# Altium PCB LED6432Clock.PcbDoc (part 1 of 6)
Units mm, origin at the board's own origin, x right, y up, seen from the top; angles counter-clockwise.
Board outline 152.4 x 101.6 mm, 2 copper layers (Top Layer, Bottom Layer); 48 components, 0 nets, 638 pads, 127 vias.
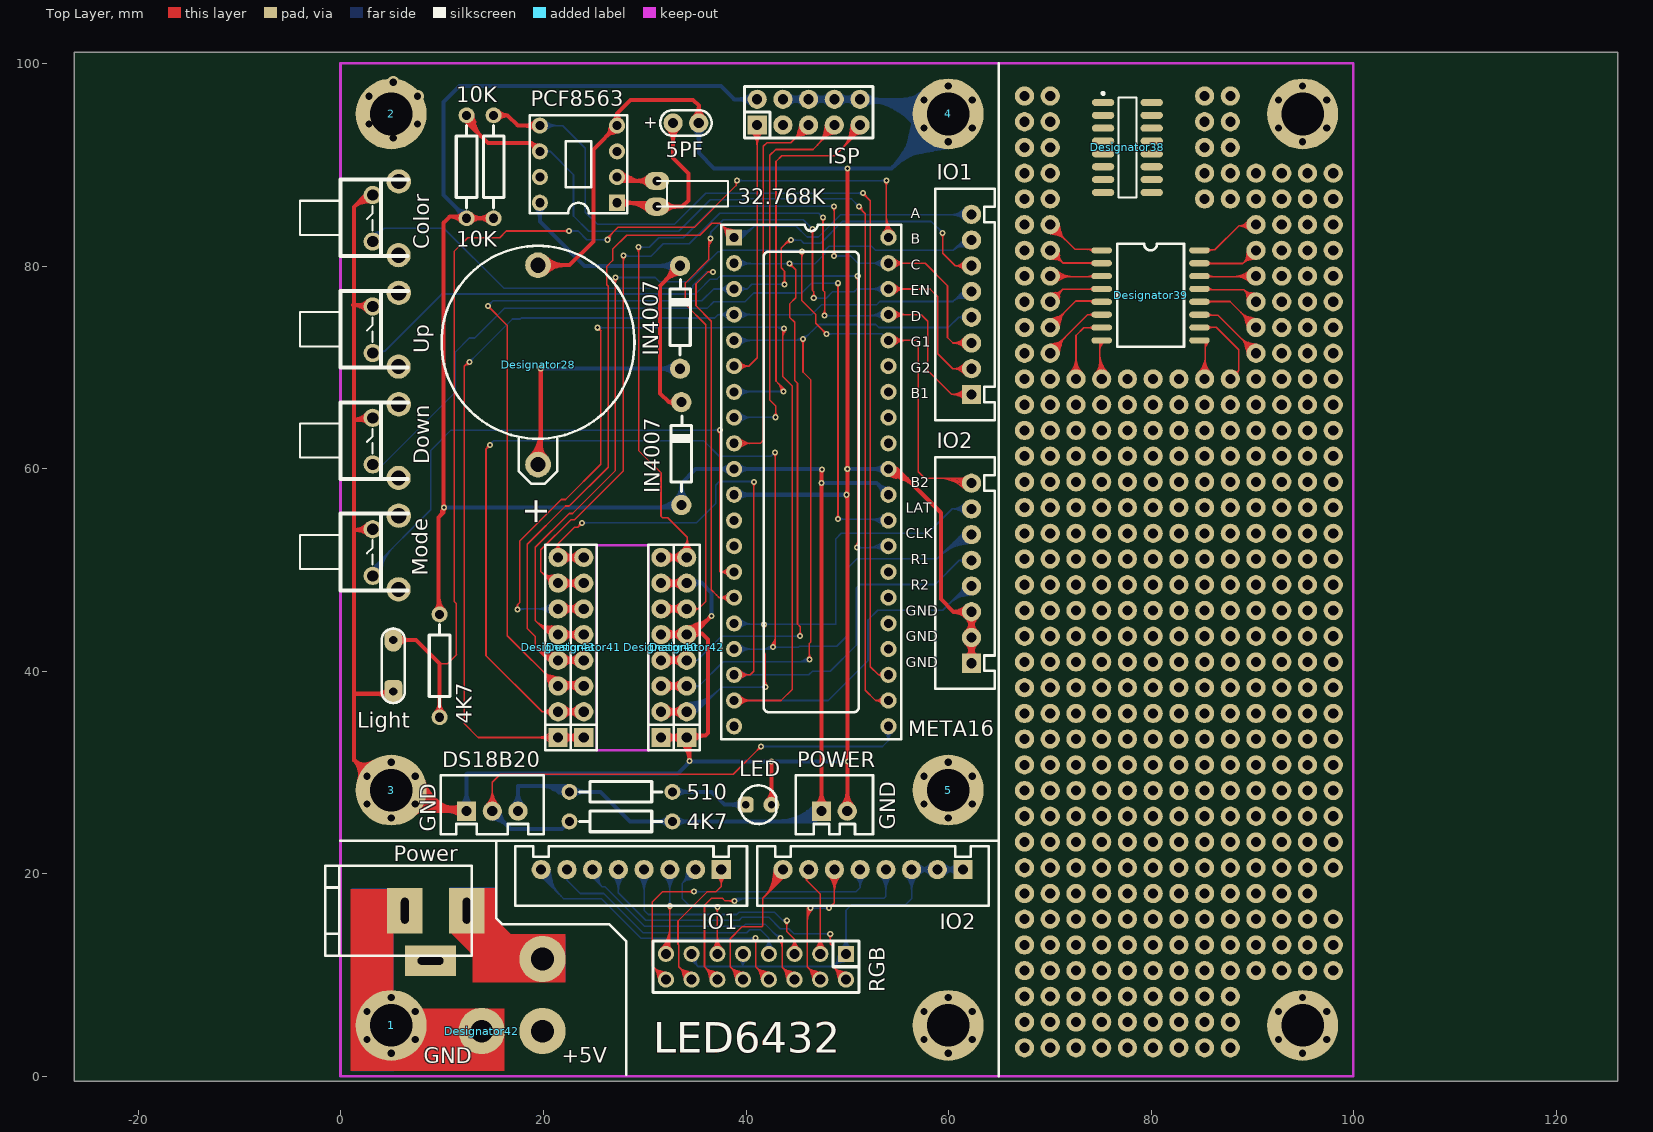
[diagram p0: Top Layer view]
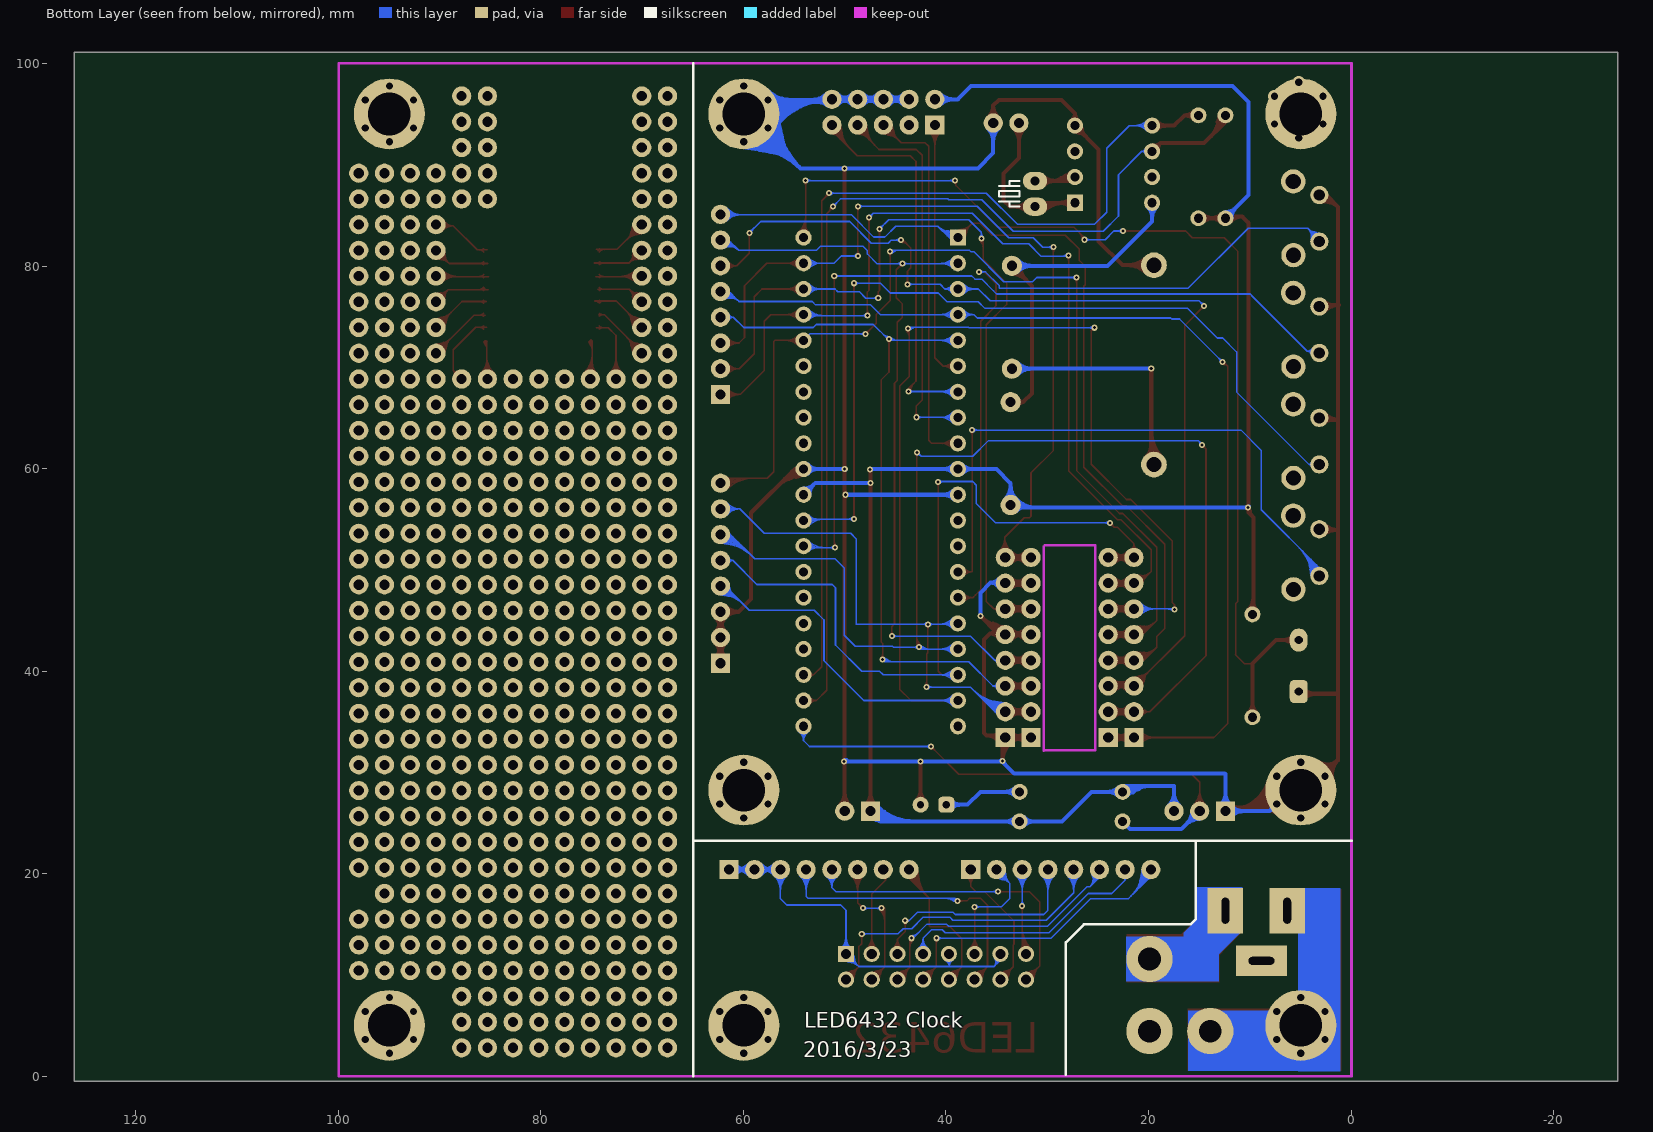
[diagram p1: Bottom Layer view, seen from below]

## Layer stack, top to bottom
Top Solder: solder mask 0.0102, Solder Resist, Dk 3.5
Top Layer: signal copper 0.0356
Dielectric 1: dielectric 0.32, FR-4, Dk 4.8
Bottom Layer: signal copper 0.0356
Bottom Solder: solder mask 0.0102, Solder Resist, Dk 3.5

## Board outline
-26.334,-0.483 126.066,-0.483 126.066,101.117 -26.334,101.117

## Design rules (kind name [scope] priority, off if disabled: settings)
Clearance [All] p1: gap=0.254
PolygonConnect [All] p1: connectstyle=Relief reliefconductorwidth=0.254 reliefentries=4 polygonreliefangle="90 Angle" airgapwidth=0.254
RoutingVias [All] p1: holewidth=0.3 width=0.6 viastyle="Through Hole" minholewidth=0.3 minwidth=0.6 maxholewidth=0.3 maxwidth=0.6
SolderMaskExpansion [All] p1: expansion=0.102
Width [All] p1: maxlimit=0.508 minlimit=0.152 preferedwidth=0.152 minimp=50.000000 maximp=50.000000 favimp=50.000000
29 further rules are at their usual default settings.

## Components (designator, comment, footprint, x,y, rotation, side; value= is the part's Value field where it differs from the comment)
1 "Comment" 螺丝孔-4mm#1 4.955,5.025 r90 top
2 "Comment" 螺丝孔-4mm#2 5.162,95.402 r90 top
3 "Comment" 螺丝孔-4mm#1 4.955,28.266 r90 top
4 "Comment" 螺丝孔-4mm#1 59.955,95.025 r90 top
4K7 "Comment" R1/4 32.721,25.171 r180 top
4K7 "Comment" R1/4 9.734,35.458 r90 top
5 "Comment" 螺丝孔-4mm#1 59.955,28.266 r90 top
5PF "Comment" DAN.1/.2 32.789,94.14 r180 top
10K "Comment" R1/4 12.401,84.734 r90 top
10K "Comment" R1/4 15.068,84.734 r90 top
32.768K "Comment" 晶振2.5/2/6/2.5 31.197,85.877 r0 top
510 "Comment" R1/4 32.721,28.092 r180 top
Color "Comment" K/2/4.5 3.13,82.422 r90 top
Designator28 "Comment" BATTERY 19.455,70.256 r90 top
Designator38 "Comment" SOIC16 77.655,91.719 r0 top
Designator39 "Comment" SOL-16 75.115,81.559 r0 top
Designator40 "Comment" "SIP8 - duplicate" 31.595,33.459 r90 top
Designator41 "Comment" "SIP8 - duplicate" 23.975,33.459 r90 top
Designator42 "Comment" 1PIN#1 13.892,4.478 r90 top
Designator42 "Comment" "SIP8 - duplicate" 34.135,33.459 r90 top
Designator43 "Comment" "SIP8 - duplicate" 21.435,33.459 r90 top
Down "Comment" K/2/4.5 3.13,60.422 r90 top
DS18B20 "Comment" P3 14.941,26.187 r0 top
IN4007 "Comment" IN4007 33.61,56.413 r90 top
IN4007 "Comment" IN4007 33.483,69.875 r90 top
IO1 "Comment" P8#1 28.657,20.415 r180 top
IO1 "Comment" P8#2 62.255,76.225 r90 top
IO2 "Comment" P8#2 52.533,20.415 r180 top
IO2 "Comment" P8#2 62.255,49.682 r90 top
ISP "Comment" "IDC10 - duplicate" 41.095,93.937 r0 top
LED "Comment" LED3mm 41.23,26.822 r0 top
Light "Comment" CC0.508cm 5.162,37.998 r90 top
META16 "Comment" DIP40插座 38.817,82.829 r0 top
Mode "Comment" K/2/4.5 3.13,49.422 r90 top
PCF8563 "Comment" DIP8插座 27.26,86.258 r180 top
POWER "Comment" P2 48.723,26.187 r0 top
Power "Comment" 电源DC插座5.4mm 12.401,16.358 r270 top
RGB "Comment" "IDC16 - duplicate" 49.866,12.09 r180 top
Up "Comment" K/2/4.5 3.13,71.422 r90 top
? "Comment" 螺丝孔-4mm#1 94.955,5.025 r90 top
? "Comment" 螺丝孔-4mm#1 59.955,5.025 r90 top
? "Comment" 螺丝孔-4mm#1 103.841,-56.871 r90 top
? "Comment" 螺丝孔-4mm#1 100.666,-54.585 r90 top
? "Comment" 1PIN#2 19.894,11.582 r90 top
? "Comment" 1PIN#3 20.021,4.47 r90 top
? "Comment" MARK 50.374,10.185 r90 top
? "Comment" MARK 8.718,10.947 r90 top
? "Comment" 螺丝孔-4mm#1 94.955,95.025 r90 top

## Footprints (in the part's own frame and the unit in brackets; to place one, negate y for a bottom-side part, rotate by r counter-clockwise, add the part's x,y. Pads: shape width x height; smd on the part's side, far side on the other; paste and mask are expansions set on the pad)
1PIN#1 [mil]
  round 180 hole 88: 1(-0.3,0)
1PIN#2 [mil]
  round 180 hole 88: 1(0,0)
1PIN#3 [mil]
  round 180 hole 88: 1(0,5)
BATTERY [mm]
  round 2.54 hole 1.5: 1(-9.842,0) 2(9.842,0)
  silkscreen extent -11.75,-9.53 11.75,9.53
CC0.508cm [mil] "5.08mm"
  rrect50% 90x70 hole 32: 1(0,0)
  oval 90x70 hole 32: 2(200,0)
  silkscreen extent -45,-45 245,45
DAN.1/.2 [mm]
  round 1.9 hole 1: 1(0,0) 2(-2.54,0)
  silkscreen extent -3.81,-1.27 1.27,1.27
DIP8插座 [mm]
  rect 1.6x1.6 hole 0.9: 1(0,0)
  round 1.6 hole 0.9: 2(0,-2.54) 3(0,-5.08) 4(0,-7.62) 5(7.62,-7.62) 6(7.62,-5.08) 7(7.62,-2.54) 8(7.62,0)
  silkscreen extent -1.02,-8.64 8.64,1.02
DIP40插座 [mm]
  rect 1.6x1.6 hole 0.9: 1(0,0)
  round 1.6 hole 0.9: 2(0,-2.54) 3(0,-5.08) 4(0,-7.62) 5(0,-10.16) 6(0,-12.7) 7(0,-15.24) 8(0,-17.78) 9(0,-20.32) 10(0,-22.86) 11(0,-25.4) 12(0,-27.94) 13(0,-30.48) 14(0,-33.02) 15(0,-35.56) 16(0,-38.1) 17(0,-40.64) 18(0,-43.18) 19(0,-45.72) 20(0,-48.26) 21(15.24,-48.26) 22(15.24,-45.72) 23(15.24,-43.18) 24(15.24,-40.64) 25(15.24,-38.1) 26(15.24,-35.56) 27(15.24,-33.02) 28(15.24,-30.48) 29(15.24,-27.94) 30(15.24,-25.4) 31(15.24,-22.86) 32(15.24,-20.32) 33(15.24,-17.78) 34(15.24,-15.24) 35(15.24,-12.7) 36(15.24,-10.16) 37(15.24,-7.62) 38(15.24,-5.08) 39(15.24,-2.54) 40(15.24,0)
  silkscreen extent -1.27,-49.53 16.51,1.27
"IDC10 - duplicate" [mm]
  rect 1.9x1.9 hole 1: 1(0,0)
  round 1.9 hole 1: 2(0,2.54) 3(2.54,0) 4(2.54,2.54) 5(5.08,0) 6(5.08,2.54) 7(7.62,0) 8(7.62,2.54) 9(10.16,0) 10(10.16,2.54)
  silkscreen extent -1.27,-1.27 11.43,3.81
"IDC16 - duplicate" [mm]
  rect 1.6x1.6 hole 1: 1(0,0)
  round 1.6 hole 1: 2(0,2.54) 3(2.54,0) 4(2.54,2.54) 5(5.08,0) 6(5.08,2.54) 7(7.62,0) 8(7.62,2.54) 9(10.16,0) 10(10.16,2.54) 11(12.7,0) 12(12.7,2.54) 13(15.24,0) 14(15.24,2.54) 15(17.78,0) 16(17.78,2.54)
  silkscreen extent -1.27,-1.27 19.05,3.81
IN4007 [mm]
  round 2 hole 1: A(0,0) K(10.16,0)
  silkscreen extent 1.35,-1.02 8.78,1.02
K/2/4.5 [mm]
  round 2.4 hole 1.5: 0(-1.337,-2.55) 1(5.938,-2.575)
  round 1.8 hole 1.1: 1(0,0) 2(4.6,0)
  silkscreen extent -1.44,-3.5 6.14,7.17
LED3mm [mil]
  rrect50% 62x62 hole 28: 1(-50,0)
  round 62 hole 28: 2(50,0)
  silkscreen extent -75,-75 69,75
MARK [mil]
  round 60 all layers, no hole: 0(50000,50000)
P2 [mm]
  rect 1.9x1.9 hole 1: 1(-1.27,0)
  round 1.9 hole 1: 2(1.27,0)
  silkscreen extent -3.81,-2.29 3.81,3.56
P3 [mm]
  rect 1.9x1.9 hole 1: 1(-2.54,0)
  round 1.9 hole 1: 2(0,0) 3(2.54,0)
  silkscreen extent -5.08,-2.29 5.08,3.56
P8#1 [mm]
  rect 1.9x1.9 hole 1: 1(-8.89,0)
  round 1.9 hole 1: 2(-6.35,0) 3(-3.81,0) 4(-1.27,0) 5(1.27,0) 6(3.81,0) A(8.89,0) B(6.35,0)
  silkscreen extent -11.43,-2.29 11.43,3.56
P8#2 [mm]
  rect 1.9x1.9 hole 1: 1(-8.89,0)
  round 1.9 hole 1: 2(-6.35,0) 3(-3.81,0) 4(-1.27,0) 5(1.27,0) 6(3.81,0) 7(6.35,0) 8(8.89,0)
  silkscreen extent -11.43,-2.29 11.43,3.56
R1/4 [mil]
  round 62 hole 35.43: 1(0,0) 2(400,0)
  silkscreen extent 40,-40 360,40
"SIP8 - duplicate" [mm]
  rect 1.9x1.9 hole 1: 1(0,0)
  round 1.9 hole 1: 2(2.54,0) 3(5.08,0) 4(7.62,0) 5(10.16,0) 6(12.7,0) 7(15.24,0) 8(17.78,0)
  silkscreen extent -1.27,-1.27 19.05,1.27
SOIC16 [mm]
  oval 2.2x0.7 smd: 1(-2.4,4.445) 2(-2.4,3.175) 3(-2.4,1.905) 4(-2.4,0.635) 5(-2.4,-0.635) 6(-2.4,-1.905) 7(-2.4,-3.175) 8(-2.4,-4.445) 9(2.4,-4.445) 10(2.4,-3.175) 11(2.4,-1.905) 12(2.4,-0.635) 13(2.4,0.635) 14(2.4,1.905) 15(2.4,3.175) 16(2.4,4.445)
  silkscreen extent -2.52,-4.95 0.9,5.47
SOL-16 [mil]
  oval 80x24 smd: 1(0,0) 2(0,-50) 3(0,-100) 4(0,-150) 5(0,-200) 6(0,-250) 7(0,-300) 8(0,-350) 9(380,-350) 10(380,-300) 11(380,-250) 12(380,-200) 13(380,-150) 14(380,-100) 15(380,-50) 16(380,0)
  silkscreen extent 60,-375 320,25
晶振2.5/2/6/2.5 [mm]
  oval 2.4x1.8 hole 0.9: 1(0,0) 2(0,2.54)
  silkscreen extent 0,0 7,2.54
电源DC插座5.4mm [mm]
  rect 4.5x3.5 hole 0.762 slot 2.54 at 0 deg: 1(0,0) 2(0,-6.096)
  rect 3x5 hole 0.762 slot 2.54 at 90 deg: 3(4.953,-3.556)
  silkscreen extent -4.44,-13.97 4.45,0.51
螺丝孔-4mm#1 [mm]
  round 7 hole 4.2: 1(0,0)
螺丝孔-4mm#2 [mm]
  round 7 hole 4.2: 1(-0.377,0.207)

## Free pads (board coordinates)
  round 1.9 hole 1: 1(67.495,2.819) 2(67.495,5.359) 3(67.495,7.899) 4(67.495,10.439) 5(67.495,12.979) 6(67.495,15.519) 7(67.495,18.059) 8(67.495,20.599) 9(67.495,23.139) 10(67.495,25.679) 11(67.495,28.219) 12(67.495,30.759) 13(67.495,33.299) 14(67.495,35.839) 15(67.495,38.379) 16(67.495,40.919) 17(67.495,43.459) 18(67.495,45.999) 19(67.495,48.539) 20(67.495,51.079) 21(67.495,53.619) 22(67.495,56.159) 23(67.495,58.699) 24(67.495,61.239) 25(67.495,63.779) 26(67.495,66.319) 27(67.495,68.859) 28(67.495,71.399) 29(67.495,73.939) 30(67.495,76.479) 31(67.495,79.019) 32(67.495,81.559) 33(67.495,84.099) 34(67.495,86.639) 35(67.495,89.179) 36(67.495,91.719) 37(67.495,94.259) 38(67.495,96.799) 39(70.035,96.799) 40(70.035,94.259) 41(70.035,91.719) 42(70.035,89.179) 43(70.035,86.639) 44(70.035,84.099) 45(70.035,81.559) 46(70.035,79.019) 47(70.035,76.479) 48(70.035,73.939) 49(70.035,71.399) 50(70.035,68.859) 51(70.035,66.319) 52(70.035,63.779) 53(70.035,61.239) 54(72.575,68.859) 55(75.115,68.859) 56(77.655,68.859) 57(80.195,68.859) 58(82.735,68.859) 59(85.275,68.859) 60(85.275,66.319) 61(82.735,66.319) 62(80.195,66.319) 63(77.655,66.319) 64(75.115,66.319) 65(72.575,66.319) 66(87.815,68.859) 67(87.815,66.319) 68(90.355,66.319) 69(90.355,68.859) 70(90.355,71.399) 71(90.355,73.939) 72(90.355,76.479) 73(90.355,79.019) 74(90.355,81.559) 75(90.355,84.099) 76(90.355,84.099) 77(87.815,86.639) 78(87.815,89.179) 79(85.275,86.639) 80(85.275,89.179) 81(85.275,91.719) 82(85.275,94.259) 83(87.815,96.799) 84(87.815,94.259) 85(87.815,91.719) 86(85.275,96.799) 89(90.355,86.639) 90(90.355,89.179) 91(92.895,89.179) 92(95.435,89.179) 93(97.975,89.179) 94(97.975,86.639) 95(92.895,86.639) 96(92.895,84.099) 97(95.435,84.099) 98(95.435,86.639) 99(97.975,84.099) 100(97.975,81.559) 101(95.435,81.559) 102(92.895,81.559) 103(92.895,79.019) 104(92.895,76.479) 105(95.435,76.479) 106(97.975,79.019) 107(95.435,79.019) 108(97.975,76.479) 109(97.975,73.939) 110(97.975,71.399) 111(97.975,68.859) 112(97.975,66.319) 113(95.435,66.319) 114(92.895,66.319) 115(92.895,68.859) 116(95.435,68.859) 117(95.435,71.399) 118(92.895,71.399) 119(92.895,73.939) 120(95.435,73.939) 121(92.895,58.699) 123(87.815,2.819) 124(87.815,5.359) 125(87.815,7.899) 126(87.815,10.439) 127(90.355,10.439) 128(92.895,10.439) 129(95.435,10.439) 130(97.975,10.439) 131(85.275,2.819) 132(82.735,2.819) 133(80.195,2.819) 134(77.655,2.819) 135(75.115,2.819) 136(72.575,2.819) 137(70.035,2.819) 138(70.035,5.359) 139(70.035,7.899) 140(70.035,12.979) 141(70.035,15.519) 142(70.035,18.059) 143(70.035,20.599) 144(70.035,23.139) 145(70.035,25.679) 146(70.035,28.219) 147(70.035,10.439) 148(70.035,30.759) 149(72.575,33.299) 150(70.035,33.299) 151(70.035,35.839) 152(70.035,38.379) 153(70.035,40.919) 154(70.035,43.459) 155(70.035,45.999) 156(70.035,48.539) 157(70.035,51.079) 158(70.035,53.619) 159(72.575,56.159) 160(70.035,58.699) 161(70.035,56.159) 162(97.975,63.779) 163(97.975,61.239) 164(97.975,58.699) 165(97.975,56.159) 167(95.435,56.159) 168(95.435,58.699) 169(95.435,61.239) 170(95.435,63.779) 171(92.895,63.779) 172(90.355,63.779) 173(92.895,61.239) 174(90.355,61.239) 175(87.815,63.779) 176(85.275,63.779) 177(82.735,63.779) 178(80.195,63.779) 179(77.655,63.779) 180(75.115,63.779) 181(72.575,63.779) 182(72.575,61.239) 183(72.575,58.699) 184(75.115,58.699) 185(75.115,61.239) 186(77.655,61.239) 187(77.655,58.699) 188(77.655,56.159) 189(77.655,53.619) 190(77.655,51.079) 191(77.655,48.539) 192(77.655,45.999) 193(77.655,43.459) 194(77.655,40.919) 195(77.655,38.379) 196(77.655,35.839) 197(80.195,33.299) 198(77.655,30.759) 199(77.655,33.299) 200(75.115,33.299) 201(75.115,30.759) 202(75.115,25.679) 203(72.575,28.219) 204(72.575,30.759) 205(72.575,25.679) 206(72.575,23.139) 207(72.575,20.599) 208(72.575,18.059) 209(72.575,15.519) 210(72.575,12.979) 211(72.575,10.439) 212(72.575,7.899) 213(72.575,53.619) 214(72.575,51.079) 215(72.575,48.539) 216(72.575,45.999) 217(72.575,40.919) 218(72.575,43.459) 219(72.575,38.379) 220(72.575,35.839) 221(75.115,35.839) 222(75.115,38.379) 223(75.115,40.919) 224(75.115,43.459) 225(75.115,45.999) 226(75.115,48.539) 227(75.115,51.079) 228(75.115,53.619) 229(75.115,56.159) 230(80.195,61.239) 231(82.735,61.239) 232(85.275,61.239) 233(87.815,61.239) 234(97.975,53.619) 235(97.975,51.079) 236(97.975,48.539) 237(97.975,45.999) 238(97.975,43.459) 239(97.975,40.919) 240(97.975,38.379) 241(97.975,35.839) 242(97.975,33.299) 243(97.975,30.759) 244(97.975,28.219) 245(97.975,25.679) 246(97.975,23.139) 247(97.975,20.599) 248(97.975,15.519) 249(95.435,12.979) 250(92.895,12.979) 251(90.355,12.979) 252(87.815,12.979) 253(85.275,12.979) 254(85.275,10.439) 255(85.275,7.899) 256(85.275,5.359) 257(82.735,5.359) 258(80.195,5.359) 259(77.655,5.359) 260(72.575,5.359) 261(75.115,5.359) 262(75.115,7.899) 263(75.115,10.439) 264(75.115,12.979) 265(75.115,15.519) 266(75.115,18.059) 267(75.115,23.139) 268(77.655,20.599) 269(75.115,20.599) 270(77.655,18.059) 271(77.655,15.519) 272(77.655,12.979) 273(77.655,10.439) 274(80.195,7.899) 275(82.735,7.899) 276(77.655,7.899) 277(80.195,10.439) 278(82.735,10.439) 279(82.735,12.979) 280(80.195,12.979) 281(80.195,15.519) 282(82.735,15.519) 283(85.275,15.519) 284(87.815,15.519) 285(90.355,15.519) 286(92.895,15.519) 287(95.435,15.519) 288(97.975,12.979) 289(95.435,18.059) 290(95.435,20.599) 291(95.435,23.139) 292(95.435,25.679) 293(95.435,28.219) 294(95.435,30.759) 295(95.435,33.299) 296(95.435,35.839) 297(95.435,38.379) 298(95.435,40.919) 299(95.435,43.459) 300(95.435,45.999) 301(95.435,48.539) 302(95.435,51.079) 303(95.435,53.619) 304(92.895,56.159) 305(92.895,53.619) 306(92.895,51.079) 307(92.895,48.539) 308(92.895,45.999) 309(92.895,43.459) 310(92.895,40.919) 311(92.895,38.379) 312(92.895,35.839) 313(92.895,33.299) 314(92.895,30.759) 315(92.895,28.219) 316(92.895,25.679) 317(92.895,23.139) 318(92.895,20.599) 319(92.895,18.059) 320(87.815,18.059) 321(90.355,18.059) 322(90.355,18.059) 325(77.655,28.219) 326(75.115,28.219) 327(77.655,25.679) 328(77.655,23.139) 329(80.195,30.759) 330(80.195,28.219) 331(80.195,25.679) 332(80.195,23.139) 333(80.195,20.599) 334(80.195,18.059) 335(82.735,18.059) 336(85.275,18.059) 337(85.275,20.599) 338(82.735,20.599) 339(87.815,20.599) 340(90.355,20.599) 341(90.355,23.139) 342(87.815,23.139) 343(85.275,23.139) 344(82.735,23.139) 345(82.735,25.679) 346(85.275,25.679) 347(87.815,25.679) 348(90.355,25.679) 349(90.355,28.219) 350(87.815,28.219) 351(85.275,28.219) 352(82.735,28.219) 353(82.735,30.759) 354(85.275,30.759) 355(87.815,30.759) 356(90.355,30.759) 357(90.355,33.299) 358(87.815,33.299) 359(85.275,33.299) 360(82.735,33.299) 361(82.735,35.839) 362(80.195,35.839) 363(80.195,38.379) 364(82.735,38.379) 365(85.275,38.379) 366(85.275,35.839) 367(87.815,35.839) 368(87.815,38.379) 369(90.355,38.379) 370(90.355,35.839) 371(90.355,40.919) 372(87.815,40.919) 373(85.275,40.919) 374(82.735,40.919) 375(80.195,40.919) 376(80.195,43.459) 377(80.195,45.999) 378(82.735,45.999) 379(82.735,43.459) 380(85.275,43.459) 381(85.275,45.999) 382(87.815,45.999) 383(87.815,43.459) 384(90.355,43.459) 385(90.355,45.999) 386(90.355,48.539) 387(87.815,48.539) 388(85.275,48.539) 389(82.735,48.539) 390(80.195,48.539) 391(80.195,51.079) 392(82.735,51.079) 393(85.275,51.079) 394(87.815,51.079) 395(90.355,51.079) 396(90.355,53.619) 397(87.815,53.619) 398(85.275,53.619) 399(82.735,53.619) 400(80.195,53.619) 401(80.195,56.159) 402(82.735,56.159) 403(85.275,56.159) 404(87.815,56.159) 405(90.355,56.159) 406(90.355,58.699) 407(87.815,58.699) 408(85.275,58.699) 409(85.275,58.699) 410(80.195,58.699) 411(82.735,58.699)

## Via types
v1: diameter 0.6, hole 0.3, Top Layer to Bottom Layer, 67 vias
v2: diameter 1.27, hole 0.711, Top Layer to Bottom Layer, 60 vias

## Nets (pads, with @x,y where several pads share a name; then routed paths per layer and width w, separated by ;. In a path a pad name is that pad's centre, name@x,y a point inside that pad or via, vN(x,y) a via of type N, cw(c..) or ccw(c..) an arc to the next point about the centre after c; other vN are vias at no path point)
pads on no net: 1.1 2.1 3.1 4.1 4K7.1 4K7.2 5.1 5PF.1 5PF.2 10K.1 10K.2 32.768K.1 32.768K.2 510.1 510.2 ?.0 ?.1 Color.0 Color.1 Color.2 Designator28.1 Designator28.2 Designator38.1 Designator38.2 Designator38.3 Designator38.4 Designator38.5 Designator38.6 Designator38.7 Designator38.8 Designator38.9 Designator38.10 Designator38.11 Designator38.12 Designator38.13 Designator38.14 Designator38.15 Designator38.16 Designator39.1 Designator39.2 Designator39.3 Designator39.4 Designator39.5 Designator39.6 Designator39.7 Designator39.8 Designator39.9 Designator39.10 Designator39.11 Designator39.12 Designator39.13 Designator39.14 Designator39.15 Designator39.16 Designator40.1 Designator40.2 Designator40.3 Designator40.4 Designator40.5 Designator40.6 Designator40.7 Designator40.8 Designator41.1 Designator41.2 Designator41.3 Designator41.4 Designator41.5 Designator41.6 Designator41.7 Designator41.8 Designator42.1 Designator42.2 Designator42.3 Designator42.4 Designator42.5 Designator42.6 Designator42.7 Designator42.8 Designator43.1 Designator43.2 Designator43.3 Designator43.4 Designator43.5 Designator43.6 Designator43.7 Designator43.8 Down.0 Down.1 Down.2 DS18B20.1 DS18B20.2 DS18B20.3 IN4007.A IN4007.K IO1.1 IO1.2 IO1.3 IO1.4 IO1.5 IO1.6 IO1.7 IO1.8 IO1.A IO1.B IO2.1 IO2.2 IO2.3 IO2.4 IO2.5 IO2.6 IO2.7 IO2.8 ISP.1 ISP.2 ISP.3 ISP.4 ISP.5 ISP.6 ISP.7 ISP.8 ISP.9 ISP.10 LED.1 LED.2 Light.1 Light.2 META16.1 META16.2 META16.3 META16.4 META16.5 META16.6 META16.7 META16.8 META16.9 META16.10 META16.11 META16.12 META16.13 META16.14 META16.15 META16.16 META16.17 META16.18 META16.19 META16.20 META16.21 META16.22 META16.23 META16.24 META16.25 META16.26 META16.27 META16.28 META16.29 META16.30 META16.31 META16.32 META16.33 META16.34 META16.35 META16.36 META16.37 META16.38 META16.39 META16.40 Mode.0 Mode.1 Mode.2 PCF8563.1 PCF8563.2 PCF8563.3 PCF8563.4 PCF8563.5 PCF8563.6 PCF8563.7 PCF8563.8 POWER.1 Power.1 Power.2 POWER.2 Power.3 RGB.1 RGB.2 RGB.3 RGB.4 RGB.5 RGB.6 RGB.7 RGB.8 RGB.9 RGB.10 RGB.11 RGB.12 RGB.13 RGB.14 RGB.15 RGB.16 Up.0 Up.1 Up.2
copper on no net: | length 7077.7